# EAGLE board Qwiic_Iridium_9603N-Panel (EAGLE 9.5.2), part 1 of 3
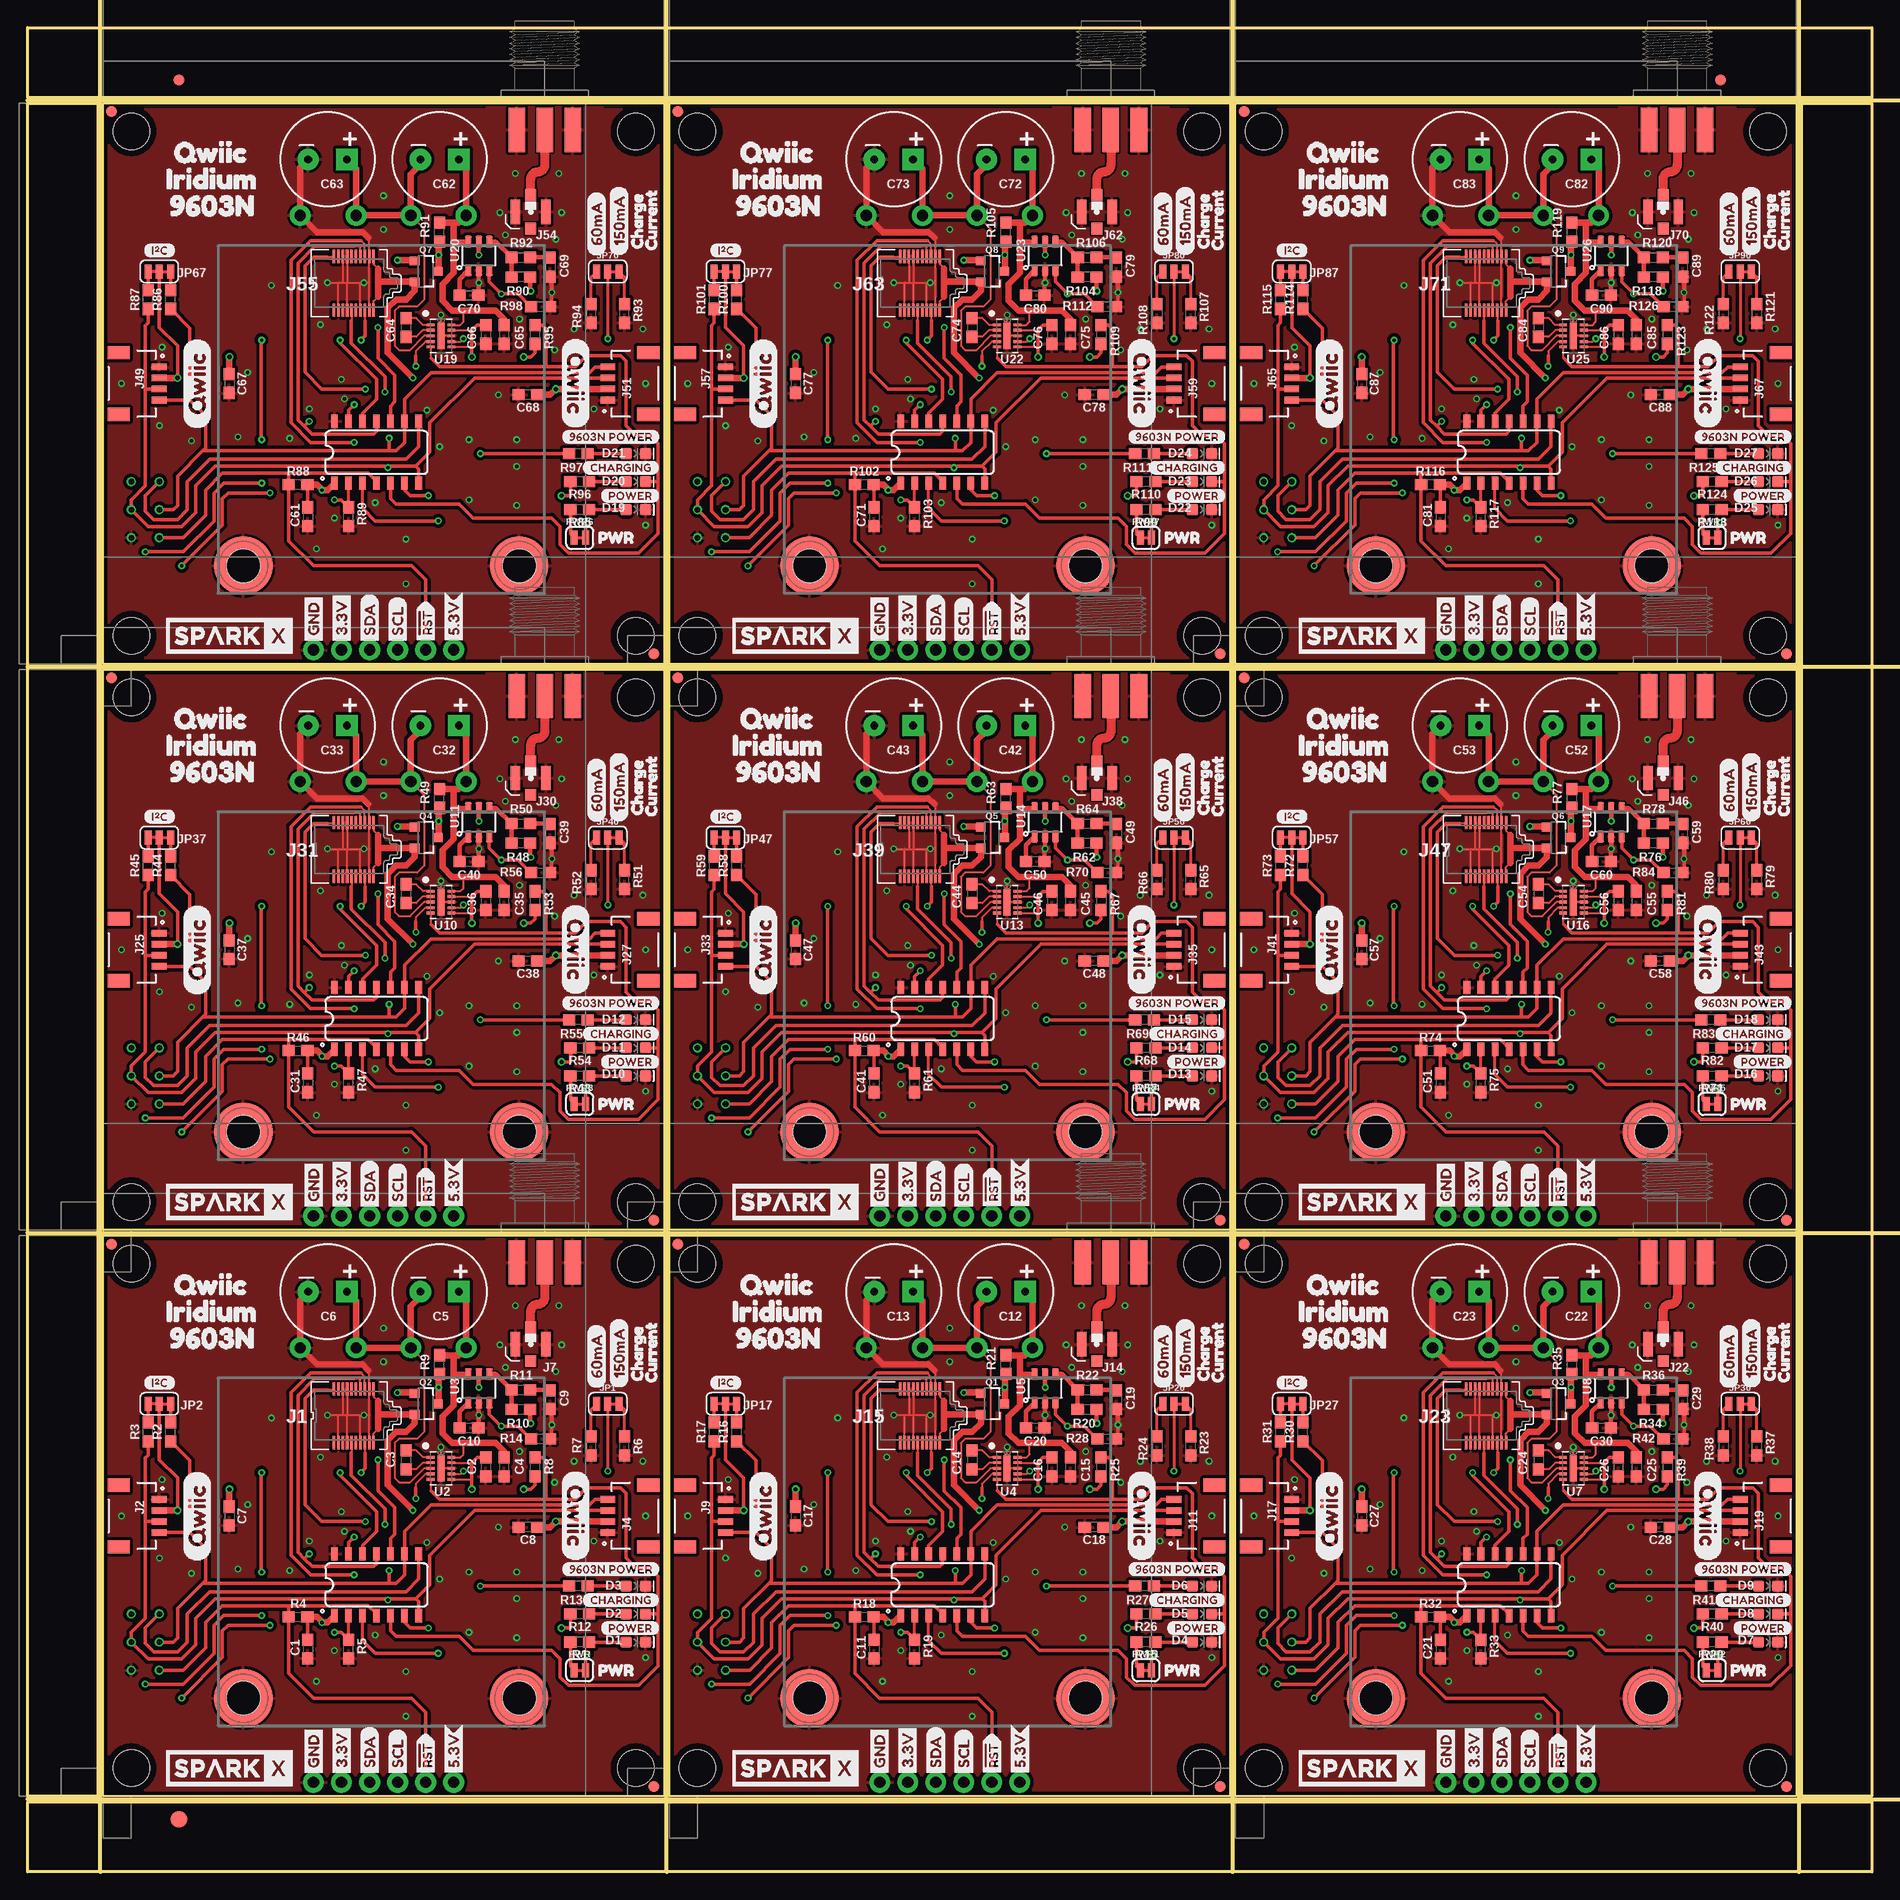
[diagram p0: board, top side]
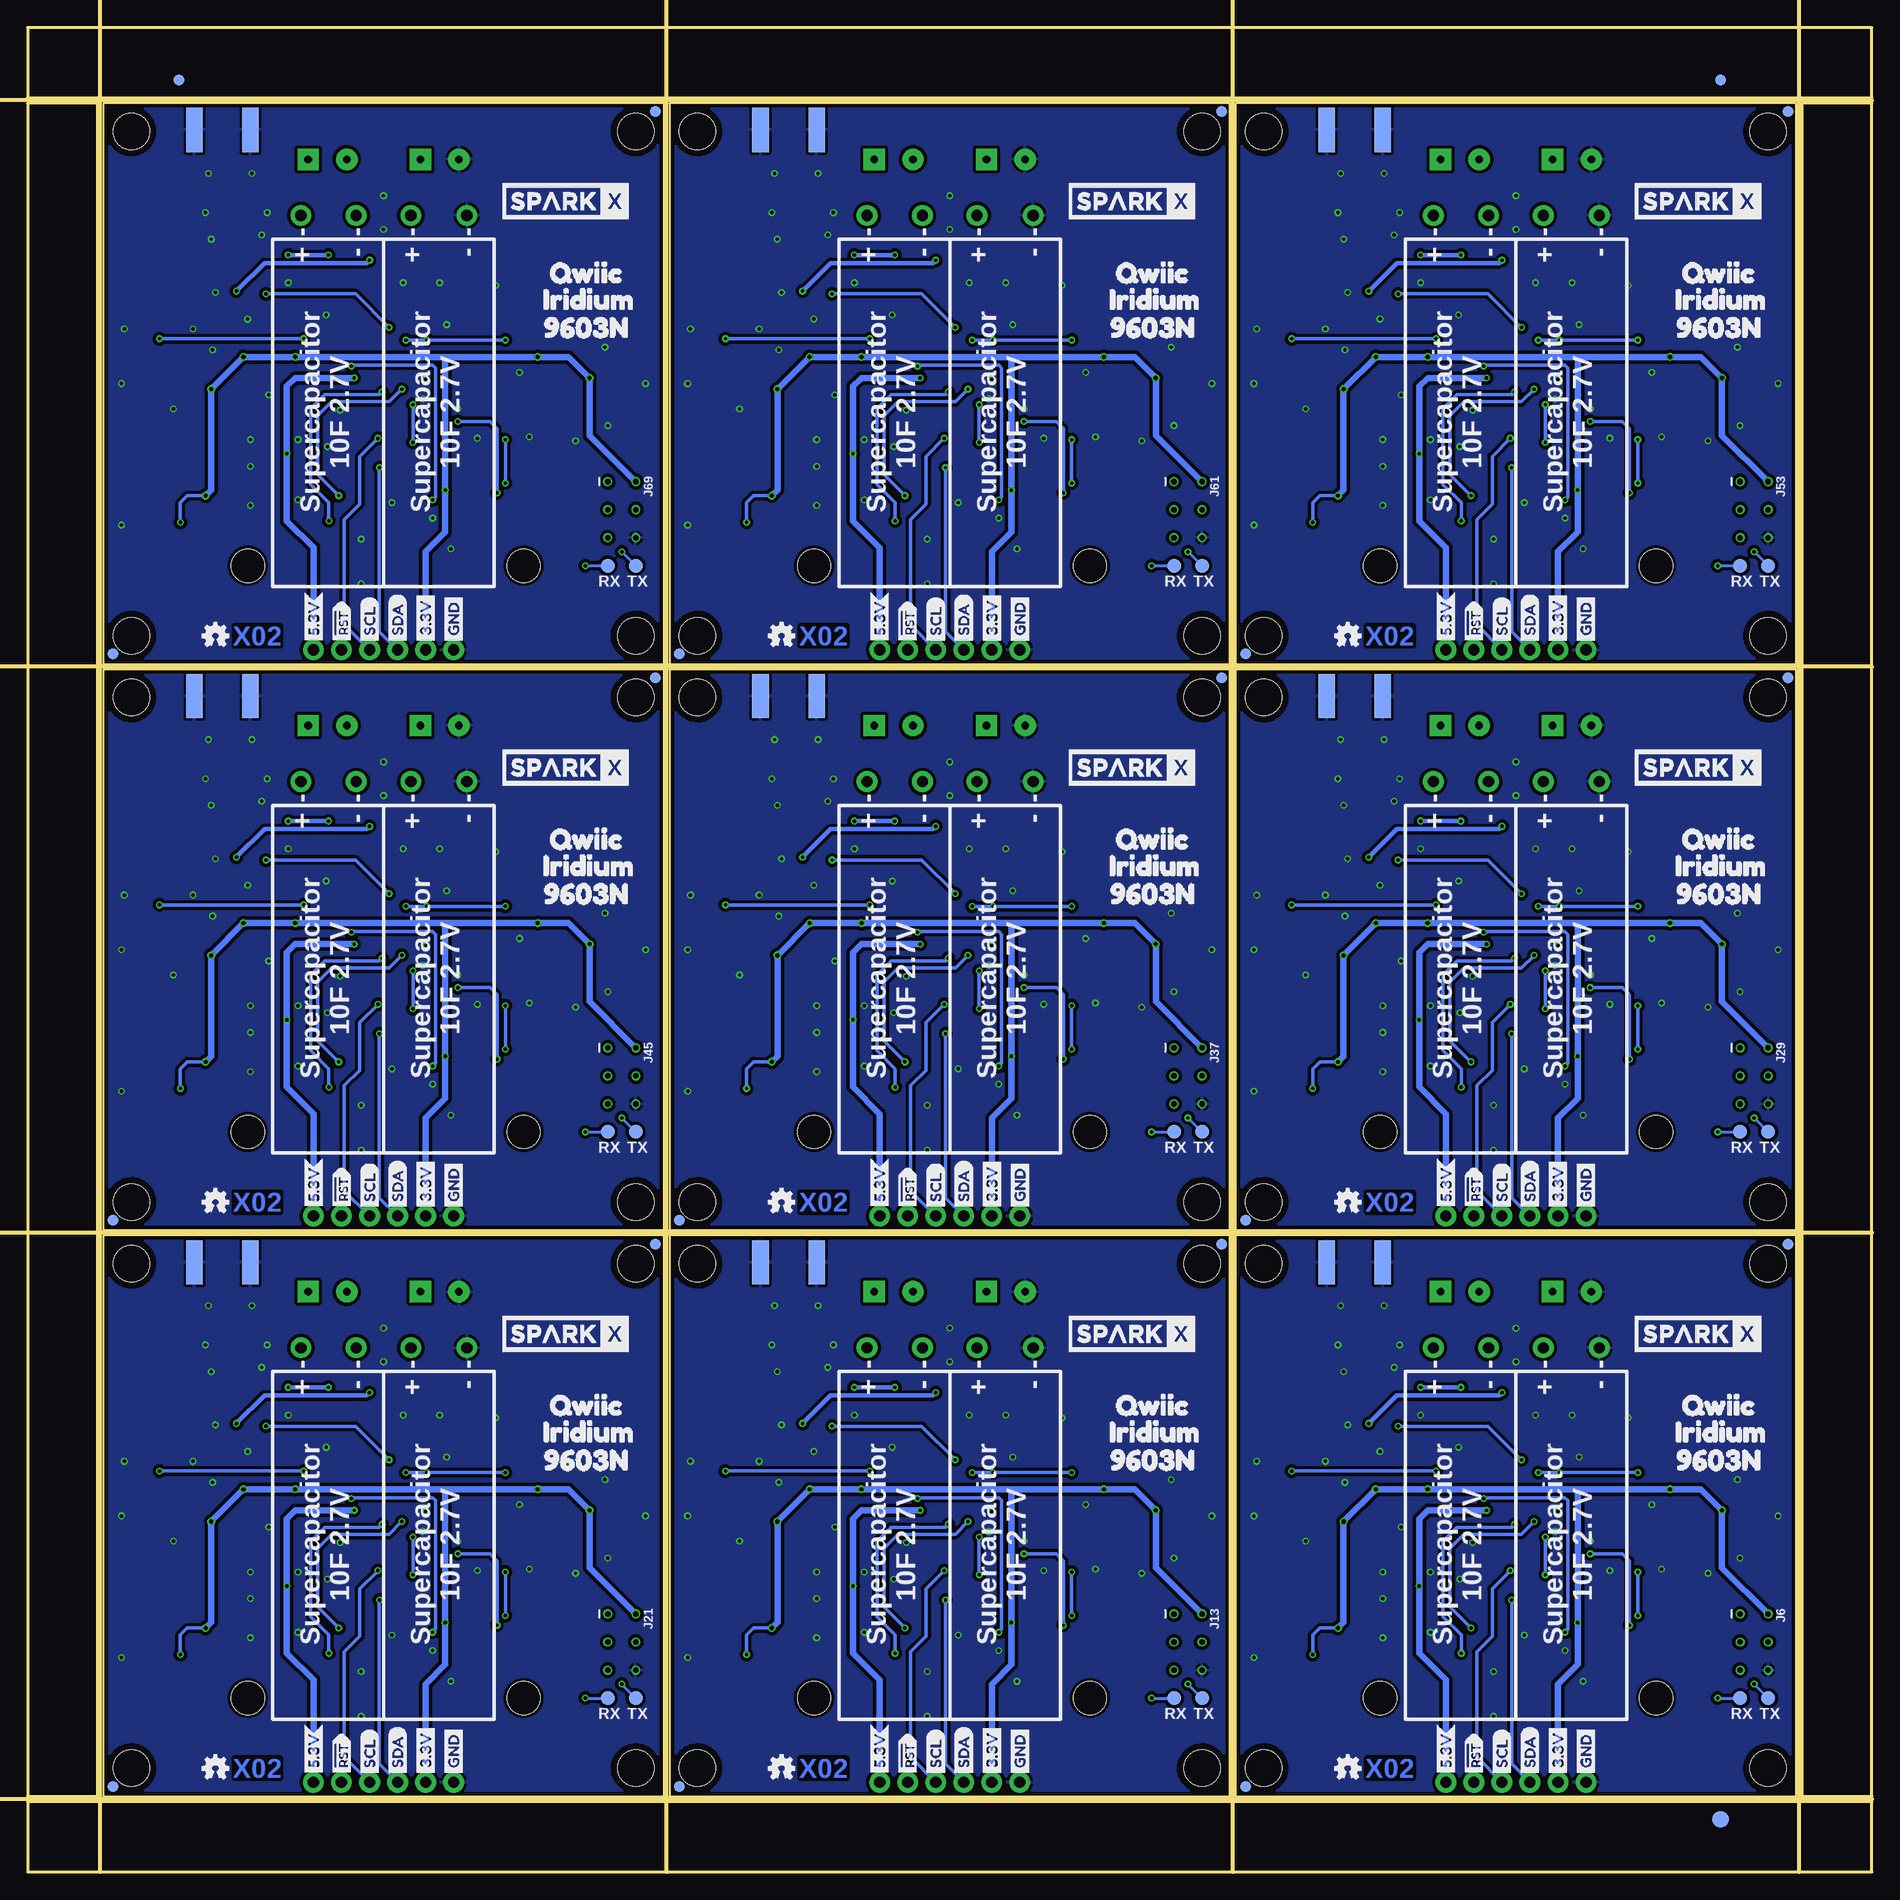
[diagram p1: board, bottom side, seen from below]

Size 167.13 x 167.13 mm. Coordinates in mm from the lower left corner, seen from the top.
Outline: 6.86,6.86 6.86,57.66 57.66,57.66 57.66,6.86 6.86,6.86
Outline: 58.17,6.86 58.17,57.66 108.97,57.66 108.97,6.86 58.17,6.86
Outline: 109.47,6.86 109.47,57.66 160.27,57.66 160.27,6.86 109.47,6.86
Outline: 6.86,58.17 6.86,108.97 57.66,108.97 57.66,58.17 6.86,58.17
Outline: 58.17,58.17 58.17,108.97 108.97,108.97 108.97,58.17 58.17,58.17
Outline: 109.47,58.17 109.47,108.97 160.27,108.97 160.27,58.17 109.47,58.17
Outline: 6.86,109.47 6.86,160.27 57.66,160.27 57.66,109.47 6.86,109.47
Outline: 58.17,109.47 58.17,160.27 108.97,160.27 108.97,109.47 58.17,109.47
Outline: 109.47,109.47 109.47,160.27 160.27,160.27 160.27,109.47 109.47,109.47
Outline: 0,6.35 167.13,6.35 167.13,0 0,0 0,6.35
Outline: 160.78,160.27 167.13,160.27 167.13,6.86 160.78,6.86 160.78,160.27
Outline: 0,167.13 167.13,167.13 167.13,160.78 0,160.78 0,167.13
Outline: 0,160.27 6.35,160.27 6.35,6.86 0,6.86 0,160.27
Copper layers (1*16): Top 0.035mm / dielectric 1.5mm / Bottom 0.035mm
Design rules "SparkFun-2-layer-PCBWay-LIMIT": minimum track width 6mil, minimum drill 0.3mm, track to track 6mil, track to pad 6mil, pad to pad 6mil, via to via 6mil, smd to smd 6mil, copper to edge 6mil, drill to drill 6mil, minimum pad ring 6mil, minimum via ring 6mil, stop-mask expansion 4mil, vias tented up to drill 25mil, thermal gap 10mil
Net classes: 1 3.3V: width 0.305 mm
Milling: 8 lines

## Footprints (pad centres in the part's own frame; a part is rotated, then mirrored left to right if it is on the bottom)
0603 = smd 1.1 x 1: 1 -0.85,0; 2 0.85,0
CPOL-RADIAL-1F-2.7V = drill 0.7 pad 1.93 square: + 1.75,0 | drill 0.7 pad 1.93: - -1.75,0
LED-0603 = smd 1 x 1: A -0.877,0; C 0.877,0
SMA-EDGE = smd 1.5 x 4: GND@0 -2.54,0; GND@1 2.54,0; SIG 0,0 | smd 1.5 x 4 bottom: GND@2 -2.54,0; GND@3 2.54,0
FIDUCIAL-1X2 = smd 1 x 1: 1 0,0
FIDUCIAL-1.5X3 = smd 1.5 x 1.5: 1 0,0
IRIDIUM_9603N = smd 0.23 x 1.2: 1 11.8,28.035; 2 11.8,23.165; 3 11.4,28.035; 4 11.4,23.165; 5 11,28.035; 6 11,23.165; 7 10.6,28.035; 8 10.6,23.165; 9 10.2,28.035; 10 10.2,23.165; 11 9.8,28.035; 12 9.8,23.165; 13 9.4,28.035; 14 9.4,23.165; 15 9,28.035; 16 9,23.165; 17 8.6,28.035; 18 8.6,23.165; 19 8.2,28.035; 20 8.2,23.165 | smd 5.3 x 5.3: HOLE1 0,0; HOLE2 25,0 | hole 3: 0,0; 25,0
JST04_1MM_RA = smd 0.6 x 1.35: 1 -1.5,0; 2 -0.5,0; 3 0.5,0; 4 1.5,0 | smd 1.2 x 2: NC1 2.8,-3.675; NC2 -2.8,-3.675
1X04_NO_SILK = drill 1.016 pad 1.88: 1 0,0; 2 2.54,0; 3 5.08,0; 4 7.62,0
1X01_NO_SILK = drill 1.016 pad 1.88: 1 0,0
2X3_TEST_POINTS = drill 0.508: 1 -2.54,-1.27; 2 -2.54,1.27; 3 0,-1.27; 4 0,1.27; 5 2.54,-1.27; 6 2.54,1.27
U.FL = smd 2.2 x 0.85: 1 0,1.375; 2 0,-1.375 | smd 1.05 x 1: FEED 1.525,0; NC -1.525,0
SMT-JUMPER_3_1-NC_TRACE_SILK = smd 0.635 x 1.27: 1 -1.016,0; 2 0,0; 3 1.016,0
SMT-JUMPER_3_2-NC_TRACE_SILK = smd 0.635 x 1.27: 1 -1.016,0; 2 0,0; 3 1.016,0
STAND-OFF = hole 3.302: 0,0
SMT-JUMPER_2_NC_TRACE_SILK = smd 0.635 x 1.27: 1 -0.508,0; 2 0.508,0
SOT23-3 = smd 0.8 x 0.9: 1 -0.95,-1; 2 0.95,-1; 3 0,1.1
PAD.03X.05 = smd 1.27 x 1.27: P$1 0,0
ATTINY841 = smd 0.6 x 1.2: 1 -3.175,-2.8; 2 -1.905,-2.8; 3 -0.635,-2.8; 4 0.635,-2.8; 5 1.905,-2.8; 6 3.175,-2.8; 7 4.445,-2.8; 8 4.445,2.8; 9 3.175,2.8; 10 1.905,2.8; 11 0.635,2.8; 12 -0.635,2.8; 13 -1.905,2.8; 14 -3.175,2.8
DFN300X200-10L = smd 0.711 x 0.254: 1 -0.94,0.991; 2 -0.94,0.508; 3 -0.94,0; 4 -0.94,-0.508; 5 -0.94,-0.991; 6 0.94,-0.991; 7 0.94,-0.508; 8 0.94,0; 9 0.94,0.508; 10 0.94,0.991 | smd 0.635 x 2.388: 11 0,0
TSOT6 = smd 0.6 x 1.05: 1 -0.95,-1.3; 2 0,-1.3; 3 0.95,-1.3; 4 0.95,1.3; 5 0,1.3; 6 -0.95,1.3

## Placement (x,y rotation side)
C1  0.1uF  [0603]  25.4,20.19 270 top
C2  2.2uF  [0603]  41.53,36.7 270 top
C3  1.0uF  [0603]  34.29,37.34 270 top
C4  0.22uF  [0603]  43.18,36.7 270 top
C5  1F 2.7V  [CPOL-RADIAL-1F-2.7V]  37.34,52.58 0 top
C6  1F 2.7V  [CPOL-RADIAL-1F-2.7V]  27.18,52.58 0 top
C7  10uF  [0603]  18.29,32.26 270 top
C8  1.0uF  [0603]  45.34,31.24 180 top
C9  10nF  [0603]  47.37,42.8 270 top
C10  1.0uF  [0603]  40,40.26 0 top
C11  0.1uF  [0603]  76.71,20.19 270 top
C12  1F 2.7V  [CPOL-RADIAL-1F-2.7V]  88.65,52.58 0 top
C13  1F 2.7V  [CPOL-RADIAL-1F-2.7V]  78.49,52.58 0 top
C14  1.0uF  [0603]  85.6,37.34 270 top
C15  0.22uF  [0603]  94.49,36.7 270 top
C16  2.2uF  [0603]  92.84,36.7 270 top
C17  10uF  [0603]  69.6,32.26 270 top
C18  1.0uF  [0603]  96.65,31.24 180 top
C19  10nF  [0603]  98.68,42.8 270 top
C20  1.0uF  [0603]  91.31,40.26 0 top
C21  0.1uF  [0603]  128.02,20.19 270 top
C22  1F 2.7V  [CPOL-RADIAL-1F-2.7V]  139.95,52.58 0 top
C23  1F 2.7V  [CPOL-RADIAL-1F-2.7V]  129.79,52.58 0 top
C24  1.0uF  [0603]  136.91,37.34 270 top
C25  0.22uF  [0603]  145.8,36.7 270 top
C26  2.2uF  [0603]  144.15,36.7 270 top
C27  10uF  [0603]  120.9,32.26 270 top
C28  1.0uF  [0603]  147.96,31.24 180 top
C29  10nF  [0603]  149.99,42.8 270 top
C30  1.0uF  [0603]  142.62,40.26 0 top
C31  0.1uF  [0603]  25.4,71.5 270 top
C32  1F 2.7V  [CPOL-RADIAL-1F-2.7V]  37.34,103.89 0 top
C33  1F 2.7V  [CPOL-RADIAL-1F-2.7V]  27.18,103.89 0 top
C34  1.0uF  [0603]  34.29,88.65 270 top
C35  0.22uF  [0603]  43.18,88.01 270 top
C36  2.2uF  [0603]  41.53,88.01 270 top
C37  10uF  [0603]  18.29,83.57 270 top
C38  1.0uF  [0603]  45.34,82.55 180 top
C39  10nF  [0603]  47.37,94.11 270 top
C40  1.0uF  [0603]  40,91.57 0 top
C41  0.1uF  [0603]  76.71,71.5 270 top
C42  1F 2.7V  [CPOL-RADIAL-1F-2.7V]  88.65,103.89 0 top
C43  1F 2.7V  [CPOL-RADIAL-1F-2.7V]  78.49,103.89 0 top
C44  1.0uF  [0603]  85.6,88.65 270 top
C45  0.22uF  [0603]  94.49,88.01 270 top
C46  2.2uF  [0603]  92.84,88.01 270 top
C47  10uF  [0603]  69.6,83.57 270 top
C48  1.0uF  [0603]  96.65,82.55 180 top
C49  10nF  [0603]  98.68,94.11 270 top
C50  1.0uF  [0603]  91.31,91.57 0 top
C51  0.1uF  [0603]  128.02,71.5 270 top
C52  1F 2.7V  [CPOL-RADIAL-1F-2.7V]  139.95,103.89 0 top
C53  1F 2.7V  [CPOL-RADIAL-1F-2.7V]  129.79,103.89 0 top
C54  1.0uF  [0603]  136.91,88.65 270 top
C55  0.22uF  [0603]  145.8,88.01 270 top
C56  2.2uF  [0603]  144.15,88.01 270 top
C57  10uF  [0603]  120.9,83.57 270 top
C58  1.0uF  [0603]  147.96,82.55 180 top
C59  10nF  [0603]  149.99,94.11 270 top
C60  1.0uF  [0603]  142.62,91.57 0 top
C61  0.1uF  [0603]  25.4,122.81 270 top
C62  1F 2.7V  [CPOL-RADIAL-1F-2.7V]  37.34,155.19 0 top
C63  1F 2.7V  [CPOL-RADIAL-1F-2.7V]  27.18,155.19 0 top
C64  1.0uF  [0603]  34.29,139.95 270 top
C65  0.22uF  [0603]  43.18,139.32 270 top
C66  2.2uF  [0603]  41.53,139.32 270 top
C67  10uF  [0603]  18.29,134.87 270 top
C68  1.0uF  [0603]  45.34,133.86 180 top
C69  10nF  [0603]  47.37,145.41 270 top
C70  1.0uF  [0603]  40,142.88 0 top
C71  0.1uF  [0603]  76.71,122.81 270 top
C72  1F 2.7V  [CPOL-RADIAL-1F-2.7V]  88.65,155.19 0 top
C73  1F 2.7V  [CPOL-RADIAL-1F-2.7V]  78.49,155.19 0 top
C74  1.0uF  [0603]  85.6,139.95 270 top
C75  0.22uF  [0603]  94.49,139.32 270 top
C76  2.2uF  [0603]  92.84,139.32 270 top
C77  10uF  [0603]  69.6,134.87 270 top
C78  1.0uF  [0603]  96.65,133.86 180 top
C79  10nF  [0603]  98.68,145.41 270 top
C80  1.0uF  [0603]  91.31,142.88 0 top
C81  0.1uF  [0603]  128.02,122.81 270 top
C82  1F 2.7V  [CPOL-RADIAL-1F-2.7V]  139.95,155.19 0 top
C83  1F 2.7V  [CPOL-RADIAL-1F-2.7V]  129.79,155.19 0 top
C84  1.0uF  [0603]  136.91,139.95 270 top
C85  0.22uF  [0603]  145.8,139.32 270 top
C86  2.2uF  [0603]  144.15,139.32 270 top
C87  10uF  [0603]  120.9,134.87 270 top
C88  1.0uF  [0603]  147.96,133.86 180 top
C89  10nF  [0603]  149.99,145.41 270 top
C90  1.0uF  [0603]  142.62,142.88 0 top
D1  RED  [LED-0603]  55.12,20.83 0 top
D2  Yellow  [LED-0603]  55.12,23.37 0 top
D3  GREEN  [LED-0603]  55.12,25.91 0 top
D4  RED  [LED-0603]  106.43,20.83 0 top
D5  Yellow  [LED-0603]  106.43,23.37 0 top
D6  GREEN  [LED-0603]  106.43,25.91 0 top
D7  RED  [LED-0603]  157.73,20.83 0 top
D8  Yellow  [LED-0603]  157.73,23.37 0 top
D9  GREEN  [LED-0603]  157.73,25.91 0 top
D10  RED  [LED-0603]  55.12,72.14 0 top
D11  Yellow  [LED-0603]  55.12,74.68 0 top
D12  GREEN  [LED-0603]  55.12,77.22 0 top
D13  RED  [LED-0603]  106.43,72.14 0 top
D14  Yellow  [LED-0603]  106.43,74.68 0 top
D15  GREEN  [LED-0603]  106.43,77.22 0 top
D16  RED  [LED-0603]  157.73,72.14 0 top
D17  Yellow  [LED-0603]  157.73,74.68 0 top
D18  GREEN  [LED-0603]  157.73,77.22 0 top
D19  RED  [LED-0603]  55.12,123.44 0 top
D20  Yellow  [LED-0603]  55.12,125.98 0 top
D21  GREEN  [LED-0603]  55.12,128.52 0 top
D22  RED  [LED-0603]  106.43,123.44 0 top
D23  Yellow  [LED-0603]  106.43,125.98 0 top
D24  GREEN  [LED-0603]  106.43,128.52 0 top
D25  RED  [LED-0603]  157.73,123.44 0 top
D26  Yellow  [LED-0603]  157.73,125.98 0 top
D27  GREEN  [LED-0603]  157.73,128.52 0 top
E1  ANTENNA-GROUNDEDEDGE_SMA  [SMA-EDGE]  46.86,55.24 0 top
E2  ANTENNA-GROUNDEDEDGE_SMA  [SMA-EDGE]  98.17,55.24 0 top
E3  ANTENNA-GROUNDEDEDGE_SMA  [SMA-EDGE]  149.48,55.24 0 top
E4  ANTENNA-GROUNDEDEDGE_SMA  [SMA-EDGE]  46.86,106.55 0 top
E5  ANTENNA-GROUNDEDEDGE_SMA  [SMA-EDGE]  98.17,106.55 0 top
E6  ANTENNA-GROUNDEDEDGE_SMA  [SMA-EDGE]  149.48,106.55 0 top
E7  ANTENNA-GROUNDEDEDGE_SMA  [SMA-EDGE]  46.86,157.86 0 top
E8  ANTENNA-GROUNDEDEDGE_SMA  [SMA-EDGE]  98.17,157.86 0 top
E9  ANTENNA-GROUNDEDEDGE_SMA  [SMA-EDGE]  149.48,157.86 0 top
E$1  [FIDUCIAL-1X2]  13.72,162.37 0 top
E$2  [FIDUCIAL-1X2]  13.72,162.37 0 bottom
E$3  [FIDUCIAL-1X2]  153.42,162.37 0 top
E$4  [FIDUCIAL-1X2]  153.42,162.37 0 bottom
E$5  [FIDUCIAL-1.5X3]  13.72,4.76 0 top
E$6  [FIDUCIAL-1.5X3]  13.72,4.76 0 bottom
J1  IRIDIUM_9603N  [IRIDIUM_9603N]  19.56,15.75 0 top
J2  [JST04_1MM_RA]  11.94,32.26 270 top
J3  PTH  [1X04_NO_SILK]  25.91,8.13 0 top
J4  [JST04_1MM_RA]  52.58,32.26 90 top
J5  [1X01_NO_SILK]  36.07,8.13 0 top
J6  ISP  [2X3_TEST_POINTS]  10.67,20.83 270 bottom
J7  U.FL  [U.FL]  45.59,47.82 90 top
J8  [1X01_NO_SILK]  38.61,8.13 0 top
J9  [JST04_1MM_RA]  63.25,32.26 270 top
J10  PTH  [1X04_NO_SILK]  77.22,8.13 0 top
J11  [JST04_1MM_RA]  103.89,32.26 90 top
J12  [1X01_NO_SILK]  87.38,8.13 0 top
J13  ISP  [2X3_TEST_POINTS]  61.98,20.83 270 bottom
J14  U.FL  [U.FL]  96.9,47.82 90 top
J15  IRIDIUM_9603N  [IRIDIUM_9603N]  70.87,15.75 0 top
J16  [1X01_NO_SILK]  89.92,8.13 0 top
J17  [JST04_1MM_RA]  114.55,32.26 270 top
J18  PTH  [1X04_NO_SILK]  128.52,8.13 0 top
J19  [JST04_1MM_RA]  155.19,32.26 90 top
J20  [1X01_NO_SILK]  138.68,8.13 0 top
J21  ISP  [2X3_TEST_POINTS]  113.28,20.83 270 bottom
J22  U.FL  [U.FL]  148.21,47.82 90 top
J23  IRIDIUM_9603N  [IRIDIUM_9603N]  122.17,15.75 0 top
J24  [1X01_NO_SILK]  141.22,8.13 0 top
J25  [JST04_1MM_RA]  11.94,83.57 270 top
J26  PTH  [1X04_NO_SILK]  25.91,59.44 0 top
J27  [JST04_1MM_RA]  52.58,83.57 90 top
J28  [1X01_NO_SILK]  36.07,59.44 0 top
J29  ISP  [2X3_TEST_POINTS]  10.67,72.14 270 bottom
J30  U.FL  [U.FL]  45.59,99.13 90 top
J31  IRIDIUM_9603N  [IRIDIUM_9603N]  19.56,67.06 0 top
J32  [1X01_NO_SILK]  38.61,59.44 0 top
J33  [JST04_1MM_RA]  63.25,83.57 270 top
J34  PTH  [1X04_NO_SILK]  77.22,59.44 0 top
J35  [JST04_1MM_RA]  103.89,83.57 90 top
J36  [1X01_NO_SILK]  87.38,59.44 0 top
J37  ISP  [2X3_TEST_POINTS]  61.98,72.14 270 bottom
J38  U.FL  [U.FL]  96.9,99.13 90 top
J39  IRIDIUM_9603N  [IRIDIUM_9603N]  70.87,67.06 0 top
J40  [1X01_NO_SILK]  89.92,59.44 0 top
J41  [JST04_1MM_RA]  114.55,83.57 270 top
J42  PTH  [1X04_NO_SILK]  128.52,59.44 0 top
J43  [JST04_1MM_RA]  155.19,83.57 90 top
J44  [1X01_NO_SILK]  138.68,59.44 0 top
J45  ISP  [2X3_TEST_POINTS]  113.28,72.14 270 bottom
J46  U.FL  [U.FL]  148.21,99.13 90 top
J47  IRIDIUM_9603N  [IRIDIUM_9603N]  122.17,67.06 0 top
J48  [1X01_NO_SILK]  141.22,59.44 0 top
J49  [JST04_1MM_RA]  11.94,134.87 270 top
J50  PTH  [1X04_NO_SILK]  25.91,110.74 0 top
J51  [JST04_1MM_RA]  52.58,134.87 90 top
J52  [1X01_NO_SILK]  36.07,110.74 0 top
J53  ISP  [2X3_TEST_POINTS]  10.67,123.44 270 bottom
J54  U.FL  [U.FL]  45.59,150.43 90 top
J55  IRIDIUM_9603N  [IRIDIUM_9603N]  19.56,118.36 0 top
J56  [1X01_NO_SILK]  38.61,110.74 0 top
J57  [JST04_1MM_RA]  63.25,134.87 270 top
J58  PTH  [1X04_NO_SILK]  77.22,110.74 0 top
J59  [JST04_1MM_RA]  103.89,134.87 90 top
J60  [1X01_NO_SILK]  87.38,110.74 0 top
J61  ISP  [2X3_TEST_POINTS]  61.98,123.44 270 bottom
J62  U.FL  [U.FL]  96.9,150.43 90 top
J63  IRIDIUM_9603N  [IRIDIUM_9603N]  70.87,118.36 0 top
J64  [1X01_NO_SILK]  89.92,110.74 0 top
J65  [JST04_1MM_RA]  114.55,134.87 270 top
J66  PTH  [1X04_NO_SILK]  128.52,110.74 0 top
J67  [JST04_1MM_RA]  155.19,134.87 90 top
J68  [1X01_NO_SILK]  138.68,110.74 0 top
J69  ISP  [2X3_TEST_POINTS]  113.28,123.44 270 bottom
J70  U.FL  [U.FL]  148.21,150.43 90 top
J71  IRIDIUM_9603N  [IRIDIUM_9603N]  122.17,118.36 0 top
J72  [1X01_NO_SILK]  141.22,110.74 0 top
JP1  JUMPER-SMT_3_1-NC_TRACE_SILK  [SMT-JUMPER_3_1-NC_TRACE_SILK]  52.58,42.42 0 top
JP2  JUMPER-SMT_3_2-NC_TRACE_SILK  [SMT-JUMPER_3_2-NC_TRACE_SILK]  11.94,42.42 180 top
JP3  STAND-OFF  [STAND-OFF]  9.4,55.12 0 top
JP4  STAND-OFF  [STAND-OFF]  55.12,55.12 0 top
JP5  FIDUCIAL1X2  [FIDUCIAL-1X2]  56.77,7.75 0 bottom
JP6  FIDUCIAL1X2  [FIDUCIAL-1X2]  7.62,56.9 0 top
JP7  FIDUCIAL1X2  [FIDUCIAL-1X2]  7.62,56.9 0 bottom
JP8  FIDUCIAL1X2  [FIDUCIAL-1X2]  56.77,7.75 0 top
JP9  STAND-OFF  [STAND-OFF]  55.12,9.4 0 top
JP10  STAND-OFF  [STAND-OFF]  9.4,9.4 0 top
JP11  STAND-OFF  [STAND-OFF]  60.71,55.12 0 top
JP12  STAND-OFF  [STAND-OFF]  106.43,55.12 0 top
JP13  FIDUCIAL1X2  [FIDUCIAL-1X2]  108.08,7.75 0 top
JP14  FIDUCIAL1X2  [FIDUCIAL-1X2]  58.93,56.9 0 top
JP15  FIDUCIAL1X2  [FIDUCIAL-1X2]  58.93,56.9 0 bottom
JP16  FIDUCIAL1X2  [FIDUCIAL-1X2]  108.08,7.75 0 bottom
JP17  JUMPER-SMT_3_2-NC_TRACE_SILK  [SMT-JUMPER_3_2-NC_TRACE_SILK]  63.25,42.42 180 top
JP18  STAND-OFF  [STAND-OFF]  60.71,9.4 0 top
JP19  STAND-OFF  [STAND-OFF]  106.43,9.4 0 top
JP20  JUMPER-SMT_3_1-NC_TRACE_SILK  [SMT-JUMPER_3_1-NC_TRACE_SILK]  103.89,42.42 0 top
JP21  STAND-OFF  [STAND-OFF]  112.01,55.12 0 top
JP22  STAND-OFF  [STAND-OFF]  157.73,55.12 0 top
JP23  FIDUCIAL1X2  [FIDUCIAL-1X2]  159.38,7.75 0 top
JP24  FIDUCIAL1X2  [FIDUCIAL-1X2]  110.24,56.9 0 top
JP25  FIDUCIAL1X2  [FIDUCIAL-1X2]  110.24,56.9 0 bottom
JP26  FIDUCIAL1X2  [FIDUCIAL-1X2]  159.38,7.75 0 bottom
JP27  JUMPER-SMT_3_2-NC_TRACE_SILK  [SMT-JUMPER_3_2-NC_TRACE_SILK]  114.55,42.42 180 top
JP28  STAND-OFF  [STAND-OFF]  112.01,9.4 0 top
JP29  STAND-OFF  [STAND-OFF]  157.73,9.4 0 top
JP30  JUMPER-SMT_3_1-NC_TRACE_SILK  [SMT-JUMPER_3_1-NC_TRACE_SILK]  155.19,42.42 0 top
JP31  STAND-OFF  [STAND-OFF]  9.4,106.43 0 top
JP32  STAND-OFF  [STAND-OFF]  55.12,106.43 0 top
JP33  FIDUCIAL1X2  [FIDUCIAL-1X2]  56.77,59.05 0 top
JP34  FIDUCIAL1X2  [FIDUCIAL-1X2]  7.62,108.2 0 top
JP35  FIDUCIAL1X2  [FIDUCIAL-1X2]  7.62,108.2 0 bottom
JP36  FIDUCIAL1X2  [FIDUCIAL-1X2]  56.77,59.05 0 bottom
JP37  JUMPER-SMT_3_2-NC_TRACE_SILK  [SMT-JUMPER_3_2-NC_TRACE_SILK]  11.94,93.73 180 top
JP38  STAND-OFF  [STAND-OFF]  9.4,60.71 0 top
JP39  STAND-OFF  [STAND-OFF]  55.12,60.71 0 top
JP40  JUMPER-SMT_3_1-NC_TRACE_SILK  [SMT-JUMPER_3_1-NC_TRACE_SILK]  52.58,93.73 0 top
JP41  STAND-OFF  [STAND-OFF]  60.71,106.43 0 top
JP42  STAND-OFF  [STAND-OFF]  106.43,106.43 0 top
JP43  FIDUCIAL1X2  [FIDUCIAL-1X2]  108.08,59.05 0 top
JP44  FIDUCIAL1X2  [FIDUCIAL-1X2]  58.93,108.2 0 top
JP45  FIDUCIAL1X2  [FIDUCIAL-1X2]  58.93,108.2 0 bottom
JP46  FIDUCIAL1X2  [FIDUCIAL-1X2]  108.08,59.05 0 bottom
JP47  JUMPER-SMT_3_2-NC_TRACE_SILK  [SMT-JUMPER_3_2-NC_TRACE_SILK]  63.25,93.73 180 top
JP48  STAND-OFF  [STAND-OFF]  60.71,60.71 0 top
JP49  STAND-OFF  [STAND-OFF]  106.43,60.71 0 top
JP50  JUMPER-SMT_3_1-NC_TRACE_SILK  [SMT-JUMPER_3_1-NC_TRACE_SILK]  103.89,93.73 0 top
JP51  STAND-OFF  [STAND-OFF]  112.01,106.43 0 top
JP52  STAND-OFF  [STAND-OFF]  157.73,106.43 0 top
JP53  FIDUCIAL1X2  [FIDUCIAL-1X2]  159.38,59.05 0 top
JP54  FIDUCIAL1X2  [FIDUCIAL-1X2]  110.24,108.2 0 top
JP55  FIDUCIAL1X2  [FIDUCIAL-1X2]  110.24,108.2 0 bottom
JP56  FIDUCIAL1X2  [FIDUCIAL-1X2]  159.38,59.05 0 bottom
JP57  JUMPER-SMT_3_2-NC_TRACE_SILK  [SMT-JUMPER_3_2-NC_TRACE_SILK]  114.55,93.73 180 top
JP58  STAND-OFF  [STAND-OFF]  112.01,60.71 0 top
JP59  STAND-OFF  [STAND-OFF]  157.73,60.71 0 top
JP60  JUMPER-SMT_3_1-NC_TRACE_SILK  [SMT-JUMPER_3_1-NC_TRACE_SILK]  155.19,93.73 0 top
JP61  STAND-OFF  [STAND-OFF]  9.4,157.73 0 top
JP62  STAND-OFF  [STAND-OFF]  55.12,157.73 0 top
JP63  FIDUCIAL1X2  [FIDUCIAL-1X2]  56.77,110.36 0 top
JP64  FIDUCIAL1X2  [FIDUCIAL-1X2]  7.62,159.51 0 top
JP65  FIDUCIAL1X2  [FIDUCIAL-1X2]  7.62,159.51 0 bottom
JP66  FIDUCIAL1X2  [FIDUCIAL-1X2]  56.77,110.36 0 bottom
JP67  JUMPER-SMT_3_2-NC_TRACE_SILK  [SMT-JUMPER_3_2-NC_TRACE_SILK]  11.94,145.03 180 top
JP68  STAND-OFF  [STAND-OFF]  9.4,112.01 0 top
JP69  STAND-OFF  [STAND-OFF]  55.12,112.01 0 top
JP70  JUMPER-SMT_3_1-NC_TRACE_SILK  [SMT-JUMPER_3_1-NC_TRACE_SILK]  52.58,145.03 0 top
JP71  STAND-OFF  [STAND-OFF]  60.71,157.73 0 top
JP72  STAND-OFF  [STAND-OFF]  106.43,157.73 0 top
JP73  FIDUCIAL1X2  [FIDUCIAL-1X2]  108.08,110.36 0 top
JP74  FIDUCIAL1X2  [FIDUCIAL-1X2]  58.93,159.51 0 top
JP75  FIDUCIAL1X2  [FIDUCIAL-1X2]  58.93,159.51 0 bottom
JP76  FIDUCIAL1X2  [FIDUCIAL-1X2]  108.08,110.36 0 bottom
JP77  JUMPER-SMT_3_2-NC_TRACE_SILK  [SMT-JUMPER_3_2-NC_TRACE_SILK]  63.25,145.03 180 top
JP78  STAND-OFF  [STAND-OFF]  60.71,112.01 0 top
JP79  STAND-OFF  [STAND-OFF]  106.43,112.01 0 top
JP80  JUMPER-SMT_3_1-NC_TRACE_SILK  [SMT-JUMPER_3_1-NC_TRACE_SILK]  103.89,145.03 0 top
JP81  STAND-OFF  [STAND-OFF]  112.01,157.73 0 top
JP82  STAND-OFF  [STAND-OFF]  157.73,157.73 0 top
JP83  FIDUCIAL1X2  [FIDUCIAL-1X2]  159.38,110.36 0 top
JP84  FIDUCIAL1X2  [FIDUCIAL-1X2]  110.24,159.51 0 top
JP85  FIDUCIAL1X2  [FIDUCIAL-1X2]  110.24,159.51 0 bottom
JP86  FIDUCIAL1X2  [FIDUCIAL-1X2]  159.38,110.36 0 bottom
JP87  JUMPER-SMT_3_2-NC_TRACE_SILK  [SMT-JUMPER_3_2-NC_TRACE_SILK]  114.55,145.03 180 top
JP88  STAND-OFF  [STAND-OFF]  112.01,112.01 0 top
JP89  STAND-OFF  [STAND-OFF]  157.73,112.01 0 top
JP90  JUMPER-SMT_3_1-NC_TRACE_SILK  [SMT-JUMPER_3_1-NC_TRACE_SILK]  155.19,145.03 0 top
LOGO1  OSHW-LOGOMINI  [OSHW-LOGO-MINI]  47.5,9.4 0 bottom
LOGO2  OSHW-LOGOMINI  [OSHW-LOGO-MINI]  98.81,9.4 0 bottom
LOGO3  OSHW-LOGOMINI  [OSHW-LOGO-MINI]  150.11,9.4 0 bottom
LOGO4  OSHW-LOGOMINI  [OSHW-LOGO-MINI]  47.5,60.71 0 bottom
LOGO5  OSHW-LOGOMINI  [OSHW-LOGO-MINI]  98.81,60.71 0 bottom
LOGO6  OSHW-LOGOMINI  [OSHW-LOGO-MINI]  150.11,60.71 0 bottom
LOGO7  OSHW-LOGOMINI  [OSHW-LOGO-MINI]  47.5,112.01 0 bottom
LOGO8  OSHW-LOGOMINI  [OSHW-LOGO-MINI]  98.81,112.01 0 bottom
LOGO9  OSHW-LOGOMINI  [OSHW-LOGO-MINI]  150.11,112.01 0 bottom
PWR  JUMPER-SMT_2_NC_TRACE_SILK  [SMT-JUMPER_2_NC_TRACE_SILK]  50.04,18.29 0 top
PWR1  JUMPER-SMT_2_NC_TRACE_SILK  [SMT-JUMPER_2_NC_TRACE_SILK]  101.35,18.29 0 top
PWR2  JUMPER-SMT_2_NC_TRACE_SILK  [SMT-JUMPER_2_NC_TRACE_SILK]  152.65,18.29 0 top
PWR3  JUMPER-SMT_2_NC_TRACE_SILK  [SMT-JUMPER_2_NC_TRACE_SILK]  50.04,69.6 0 top
PWR4  JUMPER-SMT_2_NC_TRACE_SILK  [SMT-JUMPER_2_NC_TRACE_SILK]  101.35,69.6 0 top
PWR5  JUMPER-SMT_2_NC_TRACE_SILK  [SMT-JUMPER_2_NC_TRACE_SILK]  152.65,69.6 0 top
PWR6  JUMPER-SMT_2_NC_TRACE_SILK  [SMT-JUMPER_2_NC_TRACE_SILK]  50.04,120.9 0 top
PWR7  JUMPER-SMT_2_NC_TRACE_SILK  [SMT-JUMPER_2_NC_TRACE_SILK]  101.35,120.9 0 top
PWR8  JUMPER-SMT_2_NC_TRACE_SILK  [SMT-JUMPER_2_NC_TRACE_SILK]  152.65,120.9 0 top
Q1  5.8A/30V/35mΩ  [SOT23-3]  87.38,42.42 270 top
Q2  5.8A/30V/35mΩ  [SOT23-3]  36.07,42.42 270 top
Q3  5.8A/30V/35mΩ  [SOT23-3]  138.68,42.42 270 top
Q4  5.8A/30V/35mΩ  [SOT23-3]  36.07,93.73 270 top
Q5  5.8A/30V/35mΩ  [SOT23-3]  87.38,93.73 270 top
Q6  5.8A/30V/35mΩ  [SOT23-3]  138.68,93.73 270 top
Q7  5.8A/30V/35mΩ  [SOT23-3]  36.07,145.03 270 top
Q8  5.8A/30V/35mΩ  [SOT23-3]  87.38,145.03 270 top
Q9  5.8A/30V/35mΩ  [SOT23-3]  138.68,145.03 270 top
R1  1k  [0603]  50.04,20.83 180 top
R2  2.2k  [0603]  12.95,39.88 90 top
R3  2.2k  [0603]  10.92,39.88 90 top
R4  4.7k  [0603]  24.51,23.11 0 top
R5  10k  [0603]  29.08,20.19 90 top
R6  12k  [0603]  54.1,38.61 90 top
R7  30.1k  [0603]  51.05,38.61 270 top
R8  100k  [0603]  45.97,36.7 270 top
R9  0.012 Ohm  [0603]  37.34,45.97 90 top
R10  100  [0603]  44.7,41.91 180 top
R11  100  [0603]  44.7,43.69 0 top
R12  1k  [0603]  50.04,23.37 180 top
R13  2.2k  [0603]  49.91,25.91 180 top
R14  10k  [0603]  46.48,39.24 0 top
R15  1k  [0603]  101.35,20.83 180 top
R16  2.2k  [0603]  64.26,39.88 90 top
R17  2.2k  [0603]  62.23,39.88 90 top
R18  4.7k  [0603]  75.82,23.11 0 top
R19  10k  [0603]  80.39,20.19 90 top
R20  100  [0603]  96.01,41.91 180 top
R21  0.012 Ohm  [0603]  88.65,45.97 90 top
R22  100  [0603]  96.01,43.69 0 top
R23  12k  [0603]  105.41,38.61 90 top
R24  30.1k  [0603]  102.36,38.61 270 top
R25  100k  [0603]  97.28,36.7 270 top
R26  1k  [0603]  101.35,23.37 180 top
R27  2.2k  [0603]  101.22,25.91 180 top
R28  10k  [0603]  97.79,39.24 0 top
R29  1k  [0603]  152.65,20.83 180 top
R30  2.2k  [0603]  115.57,39.88 90 top
R31  2.2k  [0603]  113.54,39.88 90 top
R32  4.7k  [0603]  127.13,23.11 0 top
R33  10k  [0603]  131.7,20.19 90 top
R34  100  [0603]  147.32,41.91 180 top
R35  0.012 Ohm  [0603]  139.95,45.97 90 top
R36  100  [0603]  147.32,43.69 0 top
R37  12k  [0603]  156.72,38.61 90 top
R38  30.1k  [0603]  153.67,38.61 270 top
R39  100k  [0603]  148.59,36.7 270 top
R40  1k  [0603]  152.65,23.37 180 top
R41  2.2k  [0603]  152.53,25.91 180 top
R42  10k  [0603]  149.1,39.24 0 top
R43  1k  [0603]  50.04,72.14 180 top
R44  2.2k  [0603]  12.95,91.19 90 top
R45  2.2k  [0603]  10.92,91.19 90 top
R46  4.7k  [0603]  24.51,74.42 0 top
R47  10k  [0603]  29.08,71.5 90 top
R48  100  [0603]  44.7,93.22 180 top
R49  0.012 Ohm  [0603]  37.34,97.28 90 top
R50  100  [0603]  44.7,95 0 top
R51  12k  [0603]  54.1,89.92 90 top
R52  30.1k  [0603]  51.05,89.92 270 top
R53  100k  [0603]  45.97,88.01 270 top
R54  1k  [0603]  50.04,74.68 180 top
R55  2.2k  [0603]  49.91,77.22 180 top
R56  10k  [0603]  46.48,90.55 0 top
R57  1k  [0603]  101.35,72.14 180 top
R58  2.2k  [0603]  64.26,91.19 90 top
R59  2.2k  [0603]  62.23,91.19 90 top
R60  4.7k  [0603]  75.82,74.42 0 top
R61  10k  [0603]  80.39,71.5 90 top
R62  100  [0603]  96.01,93.22 180 top
R63  0.012 Ohm  [0603]  88.65,97.28 90 top
R64  100  [0603]  96.01,95 0 top
R65  12k  [0603]  105.41,89.92 90 top
R66  30.1k  [0603]  102.36,89.92 270 top
R67  100k  [0603]  97.28,88.01 270 top
R68  1k  [0603]  101.35,74.68 180 top
R69  2.2k  [0603]  101.22,77.22 180 top
R70  10k  [0603]  97.79,90.55 0 top
R71  1k  [0603]  152.65,72.14 180 top
R72  2.2k  [0603]  115.57,91.19 90 top
R73  2.2k  [0603]  113.54,91.19 90 top
R74  4.7k  [0603]  127.13,74.42 0 top
R75  10k  [0603]  131.7,71.5 90 top
R76  100  [0603]  147.32,93.22 180 top
R77  0.012 Ohm  [0603]  139.95,97.28 90 top
R78  100  [0603]  147.32,95 0 top
R79  12k  [0603]  156.72,89.92 90 top
R80  30.1k  [0603]  153.67,89.92 270 top
R81  100k  [0603]  148.59,88.01 270 top
R82  1k  [0603]  152.65,74.68 180 top
R83  2.2k  [0603]  152.53,77.22 180 top
R84  10k  [0603]  149.1,90.55 0 top
R85  1k  [0603]  50.04,123.44 180 top
R86  2.2k  [0603]  12.95,142.49 90 top
R87  2.2k  [0603]  10.92,142.49 90 top
R88  4.7k  [0603]  24.51,125.73 0 top
R89  10k  [0603]  29.08,122.81 90 top
R90  100  [0603]  44.7,144.53 180 top
R91  0.012 Ohm  [0603]  37.34,148.59 90 top
R92  100  [0603]  44.7,146.3 0 top
R93  12k  [0603]  54.1,141.22 90 top
R94  30.1k  [0603]  51.05,141.22 270 top
R95  100k  [0603]  45.97,139.32 270 top
R96  1k  [0603]  50.04,125.98 180 top
R97  2.2k  [0603]  49.91,128.52 180 top
R98  10k  [0603]  46.48,141.86 0 top
R99  1k  [0603]  101.35,123.44 180 top
R100  2.2k  [0603]  64.26,142.49 90 top
R101  2.2k  [0603]  62.23,142.49 90 top
R102  4.7k  [0603]  75.82,125.73 0 top
R103  10k  [0603]  80.39,122.81 90 top
R104  100  [0603]  96.01,144.53 180 top
R105  0.012 Ohm  [0603]  88.65,148.59 90 top
R106  100  [0603]  96.01,146.3 0 top
R107  12k  [0603]  105.41,141.22 90 top
R108  30.1k  [0603]  102.36,141.22 270 top
R109  100k  [0603]  97.28,139.32 270 top
R110  1k  [0603]  101.35,125.98 180 top
R111  2.2k  [0603]  101.22,128.52 180 top
R112  10k  [0603]  97.79,141.86 0 top
R113  1k  [0603]  152.65,123.44 180 top
R114  2.2k  [0603]  115.57,142.49 90 top
R115  2.2k  [0603]  113.54,142.49 90 top
R116  4.7k  [0603]  127.13,125.73 0 top
R117  10k  [0603]  131.7,122.81 90 top
R118  100  [0603]  147.32,144.53 180 top
R119  0.012 Ohm  [0603]  139.95,148.59 90 top
R120  100  [0603]  147.32,146.3 0 top
R121  12k  [0603]  156.72,141.22 90 top
R122  30.1k  [0603]  153.67,141.22 270 top
R123  100k  [0603]  148.59,139.32 270 top
R124  1k  [0603]  152.65,125.98 180 top
R125  2.2k  [0603]  152.53,128.52 180 top
R126  10k  [0603]  149.1,141.86 0 top
RX  TEST-POINT3X5  [PAD.03X.05]  11.94,15.75 0 bottom
RX1  TEST-POINT3X5  [PAD.03X.05]  63.25,15.75 0 bottom
RX2  TEST-POINT3X5  [PAD.03X.05]  114.55,15.75 0 bottom
RX3  TEST-POINT3X5  [PAD.03X.05]  11.94,67.06 0 bottom
RX4  TEST-POINT3X5  [PAD.03X.05]  63.25,67.06 0 bottom
RX5  TEST-POINT3X5  [PAD.03X.05]  114.55,67.06 0 bottom
RX6  TEST-POINT3X5  [PAD.03X.05]  11.94,118.36 0 bottom
RX7  TEST-POINT3X5  [PAD.03X.05]  63.25,118.36 0 bottom
RX8  TEST-POINT3X5  [PAD.03X.05]  114.55,118.36 0 bottom
SC1+  [1X01_NO_SILK]  39.75,47.5 0 top
SC1+1  [1X01_NO_SILK]  91.06,47.5 0 top
SC1+2  [1X01_NO_SILK]  142.37,47.5 0 top
SC1+3  [1X01_NO_SILK]  39.75,98.81 0 top
SC1+4  [1X01_NO_SILK]  91.06,98.81 0 top
SC1+5  [1X01_NO_SILK]  142.37,98.81 0 top
SC1+6  [1X01_NO_SILK]  39.75,150.11 0 top
SC1+7  [1X01_NO_SILK]  91.06,150.11 0 top
SC1+8  [1X01_NO_SILK]  142.37,150.11 0 top
SC1-  [1X01_NO_SILK]  34.73,47.5 0 top
SC1-1  [1X01_NO_SILK]  86.04,47.5 0 top
SC1-2  [1X01_NO_SILK]  137.35,47.5 0 top
SC1-3  [1X01_NO_SILK]  34.73,98.81 0 top
SC1-4  [1X01_NO_SILK]  86.04,98.81 0 top
SC1-5  [1X01_NO_SILK]  137.35,98.81 0 top
SC1-6  [1X01_NO_SILK]  34.73,150.11 0 top
SC1-7  [1X01_NO_SILK]  86.04,150.11 0 top
SC1-8  [1X01_NO_SILK]  137.35,150.11 0 top
SC2+  [1X01_NO_SILK]  29.78,47.5 0 top
SC2+1  [1X01_NO_SILK]  81.09,47.5 0 top
SC2+2  [1X01_NO_SILK]  132.4,47.5 0 top
SC2+3  [1X01_NO_SILK]  29.78,98.81 0 top
SC2+4  [1X01_NO_SILK]  81.09,98.81 0 top
SC2+5  [1X01_NO_SILK]  132.4,98.81 0 top
SC2+6  [1X01_NO_SILK]  29.78,150.11 0 top
SC2+7  [1X01_NO_SILK]  81.09,150.11 0 top
SC2+8  [1X01_NO_SILK]  132.4,150.11 0 top
SC2-  [1X01_NO_SILK]  24.7,47.5 0 top
SC2-1  [1X01_NO_SILK]  76.01,47.5 0 top
SC2-2  [1X01_NO_SILK]  127.32,47.5 0 top
SC2-3  [1X01_NO_SILK]  24.7,98.81 0 top
SC2-4  [1X01_NO_SILK]  76.01,98.81 0 top
SC2-5  [1X01_NO_SILK]  127.32,98.81 0 top
SC2-6  [1X01_NO_SILK]  24.7,150.11 0 top
SC2-7  [1X01_NO_SILK]  76.01,150.11 0 top
SC2-8  [1X01_NO_SILK]  127.32,150.11 0 top
TX  TEST-POINT3X5  [PAD.03X.05]  9.4,15.75 0 bottom
TX1  TEST-POINT3X5  [PAD.03X.05]  60.71,15.75 0 bottom
TX2  TEST-POINT3X5  [PAD.03X.05]  112.01,15.75 0 bottom
TX3  TEST-POINT3X5  [PAD.03X.05]  9.4,67.06 0 bottom
TX4  TEST-POINT3X5  [PAD.03X.05]  60.71,67.06 0 bottom
TX5  TEST-POINT3X5  [PAD.03X.05]  112.01,67.06 0 bottom
TX6  TEST-POINT3X5  [PAD.03X.05]  9.4,118.36 0 bottom
TX7  TEST-POINT3X5  [PAD.03X.05]  60.71,118.36 0 bottom
TX8  TEST-POINT3X5  [PAD.03X.05]  112.01,118.36 0 bottom
U1  ATTINY841SOIC  [ATTINY841]  30.99,26.04 0 top
U2  LTC3225EDDB#TRMPBF  [DFN300X200-10L]  37.46,36.58 0 top
U3  ADM4210-1  [TSOT6]  40.89,43.81 0 top
U4  LTC3225EDDB#TRMPBF  [DFN300X200-10L]  88.77,36.58 0 top
U5  ADM4210-1  [TSOT6]  92.2,43.81 0 top
U6  ATTINY841SOIC  [ATTINY841]  82.3,26.04 0 top
U7  LTC3225EDDB#TRMPBF  [DFN300X200-10L]  140.08,36.58 0 top
U8  ADM4210-1  [TSOT6]  143.51,43.81 0 top
U9  ATTINY841SOIC  [ATTINY841]  133.6,26.04 0 top
U10  LTC3225EDDB#TRMPBF  [DFN300X200-10L]  37.46,87.88 0 top
U11  ADM4210-1  [TSOT6]  40.89,95.12 0 top
U12  ATTINY841SOIC  [ATTINY841]  30.99,77.34 0 top
U13  LTC3225EDDB#TRMPBF  [DFN300X200-10L]  88.77,87.88 0 top
U14  ADM4210-1  [TSOT6]  92.2,95.12 0 top
U15  ATTINY841SOIC  [ATTINY841]  82.3,77.34 0 top
U16  LTC3225EDDB#TRMPBF  [DFN300X200-10L]  140.08,87.88 0 top
U17  ADM4210-1  [TSOT6]  143.51,95.12 0 top
U18  ATTINY841SOIC  [ATTINY841]  133.6,77.34 0 top
U19  LTC3225EDDB#TRMPBF  [DFN300X200-10L]  37.46,139.19 0 top
U20  ADM4210-1  [TSOT6]  40.89,146.43 0 top
U21  ATTINY841SOIC  [ATTINY841]  30.99,128.65 0 top
U22  LTC3225EDDB#TRMPBF  [DFN300X200-10L]  88.77,139.19 0 top
U23  ADM4210-1  [TSOT6]  92.2,146.43 0 top
U24  ATTINY841SOIC  [ATTINY841]  82.3,128.65 0 top
U25  LTC3225EDDB#TRMPBF  [DFN300X200-10L]  140.08,139.19 0 top
U26  ADM4210-1  [TSOT6]  143.51,146.43 0 top
U27  ATTINY841SOIC  [ATTINY841]  133.6,128.65 0 top
U$1  [60MA0]  51.56,43.81 90 top
U$2  [POWER0]  51.94,22.1 0 top
U$3  [GND1]  25.91,8.51 90 bottom
U$4  [3#3V2]  28.45,8.51 90 bottom
U$5  [SDA8]  30.99,8.51 90 bottom
U$6  [SCL9]  33.53,8.51 90 bottom
U$7  [RST#-[>]  36.07,8.38 90 top
U$8  [I_SUPER2_C-()-03]  10.54,44.32 0 top
U$9  [CHARGING0]  50.29,24.64 0 top
U$10  [9603N_POWER0]  48.39,27.43 0 top
U$11  [5#3V0]  38.61,8.51 90 bottom
U$12  [QWIIC0]  11.68,53.21 0 top
U$13  [150MA0]  53.59,43.81 90 top
U$14  [CHARGE0]  55.24,43.56 90 top
U$15  [CURRENT0]  56.51,43.43 90 top
U$16  [RST#-[>]  36.07,8.38 90 bottom
U$17  [QWIIC0]  18.8,42.29 0 bottom
U$18  [IRIDIUM0]  10.92,50.8 0 top
U$19  [IRIDIUM0]  19.43,39.88 0 bottom
U$20  [9603N0]  11.3,48.39 0 top
U$21  [3#3V2]  28.45,8.51 90 top
U$22  [GND1]  25.91,8.51 90 top
U$23  [QWIIC0]  15.37,28.07 90 top
U$24  [9603N0]  19.3,37.34 0 bottom
U$25  [QWIIC0]  49.66,36.45 270 top
U$26  [SCL9]  33.53,8.51 90 top
U$27  [SDA8]  30.99,8.51 90 top
U$28  [3#3V2]  79.76,8.51 90 top
U$29  [SPARKX-LARGE]  15.75,48.77 0 bottom
U$30  [SPARKX-LARGE]  18.29,9.4 0 top
U$31  [_PWR1]  50.42,18.29 0 top
U$32  [5#3V0]  38.61,8.51 90 top
U$33  [GND1]  77.22,8.51 90 top
U$34  [SCL9]  84.84,8.51 90 top
U$35  [SDA8]  82.3,8.51 90 top
U$36  [GND1]  77.22,8.51 90 bottom
U$37  [3#3V2]  79.76,8.51 90 bottom
U$38  [SDA8]  82.3,8.51 90 bottom
U$39  [SCL9]  84.84,8.51 90 bottom
U$40  [I_SUPER2_C-()-03]  61.85,44.32 0 top
U$41  [RST#-[>]  87.38,8.38 90 top
U$42  [RST#-[>]  87.38,8.38 90 bottom
U$43  [POWER0]  103.25,22.1 0 top
U$44  [CHARGING0]  101.6,24.64 0 top
U$45  [9603N_POWER0]  99.7,27.43 0 top
U$46  [60MA0]  102.87,43.81 90 top
U$47  [150MA0]  104.9,43.81 90 top
U$48  [CHARGE0]  106.55,43.56 90 top
U$49  [CURRENT0]  107.82,43.43 90 top
U$50  [QWIIC0]  62.99,53.21 0 top
U$51  [QWIIC0]  70.1,42.29 0 bottom
U$52  [IRIDIUM0]  62.23,50.8 0 top
U$53  [IRIDIUM0]  70.74,39.88 0 bottom
U$54  [9603N0]  62.61,48.39 0 top
U$55  [9603N0]  70.61,37.34 0 bottom
U$56  [QWIIC0]  66.67,28.07 90 top
U$57  [QWIIC0]  100.97,36.45 270 top
U$58  [SPARKX-LARGE]  67.06,48.77 0 bottom
U$59  [SPARKX-LARGE]  69.6,9.4 0 top
U$60  [_PWR1]  101.73,18.29 0 top
U$61  [5#3V0]  89.92,8.51 90 top
U$62  [5#3V0]  89.92,8.51 90 bottom
U$63  [3#3V2]  131.06,8.51 90 top
U$64  [GND1]  128.52,8.51 90 top
U$65  [SCL9]  136.14,8.51 90 top
U$66  [SDA8]  133.6,8.51 90 top
U$67  [GND1]  128.52,8.51 90 bottom
U$68  [3#3V2]  131.06,8.51 90 bottom
U$69  [SDA8]  133.6,8.51 90 bottom
U$70  [SCL9]  136.14,8.51 90 bottom
U$71  [I_SUPER2_C-()-03]  113.16,44.32 0 top
U$72  [RST#-[>]  138.68,8.38 90 top
U$73  [RST#-[>]  138.68,8.38 90 bottom
U$74  [POWER0]  154.56,22.1 0 top
U$75  [CHARGING0]  152.91,24.64 0 top
U$76  [9603N_POWER0]  151,27.43 0 top
U$77  [60MA0]  154.18,43.81 90 top
U$78  [150MA0]  156.21,43.81 90 top
U$79  [CHARGE0]  157.86,43.56 90 top
U$80  [CURRENT0]  159.13,43.43 90 top
U$81  [QWIIC0]  114.3,53.21 0 top
U$82  [QWIIC0]  121.41,42.29 0 bottom
U$83  [IRIDIUM0]  113.54,50.8 0 top
U$84  [IRIDIUM0]  122.05,39.88 0 bottom
U$85  [9603N0]  113.92,48.39 0 top
U$86  [9603N0]  121.92,37.34 0 bottom
U$87  [QWIIC0]  117.98,28.07 90 top
U$88  [QWIIC0]  152.27,36.45 270 top
U$89  [SPARKX-LARGE]  118.36,48.77 0 bottom
U$90  [SPARKX-LARGE]  120.9,9.4 0 top
U$91  [_PWR1]  153.03,18.29 0 top
U$92  [5#3V0]  141.22,8.51 90 top
U$93  [5#3V0]  141.22,8.51 90 bottom
U$94  [3#3V2]  28.45,59.82 90 top
U$95  [GND1]  25.91,59.82 90 top
U$96  [SCL9]  33.53,59.82 90 top
U$97  [SDA8]  30.99,59.82 90 top
U$98  [GND1]  25.91,59.82 90 bottom
U$99  [3#3V2]  28.45,59.82 90 bottom
U$100  [SDA8]  30.99,59.82 90 bottom
U$101  [SCL9]  33.53,59.82 90 bottom
U$102  [I_SUPER2_C-()-03]  10.54,95.63 0 top
U$103  [RST#-[>]  36.07,59.69 90 top
U$104  [RST#-[>]  36.07,59.69 90 bottom
U$105  [POWER0]  51.94,73.41 0 top
U$106  [CHARGING0]  50.29,75.95 0 top
U$107  [9603N_POWER0]  48.39,78.74 0 top
U$108  [60MA0]  51.56,95.12 90 top
U$109  [150MA0]  53.59,95.12 90 top
U$110  [CHARGE0]  55.24,94.87 90 top
U$111  [CURRENT0]  56.51,94.74 90 top
U$112  [QWIIC0]  11.68,104.52 0 top
U$113  [QWIIC0]  18.8,93.6 0 bottom
U$114  [IRIDIUM0]  10.92,102.11 0 top
U$115  [IRIDIUM0]  19.43,91.19 0 bottom
U$116  [9603N0]  11.3,99.7 0 top
U$117  [9603N0]  19.3,88.65 0 bottom
U$118  [QWIIC0]  15.37,79.38 90 top
U$119  [QWIIC0]  49.66,87.76 270 top
U$120  [SPARKX-LARGE]  15.75,100.08 0 bottom
U$121  [SPARKX-LARGE]  18.29,60.71 0 top
U$122  [_PWR1]  50.42,69.6 0 top
U$123  [5#3V0]  38.61,59.82 90 top
U$124  [5#3V0]  38.61,59.82 90 bottom
U$125  [3#3V2]  79.76,59.82 90 top
U$126  [GND1]  77.22,59.82 90 top
U$127  [SCL9]  84.84,59.82 90 top
U$128  [SDA8]  82.3,59.82 90 top
U$129  [GND1]  77.22,59.82 90 bottom
U$130  [3#3V2]  79.76,59.82 90 bottom
U$131  [SDA8]  82.3,59.82 90 bottom
U$132  [SCL9]  84.84,59.82 90 bottom
U$133  [I_SUPER2_C-()-03]  61.85,95.63 0 top
U$134  [RST#-[>]  87.38,59.69 90 top
U$135  [RST#-[>]  87.38,59.69 90 bottom
U$136  [POWER0]  103.25,73.41 0 top
U$137  [CHARGING0]  101.6,75.95 0 top
U$138  [9603N_POWER0]  99.7,78.74 0 top
U$139  [60MA0]  102.87,95.12 90 top
U$140  [150MA0]  104.9,95.12 90 top
U$141  [CHARGE0]  106.55,94.87 90 top
U$142  [CURRENT0]  107.82,94.74 90 top
U$143  [QWIIC0]  62.99,104.52 0 top
U$144  [QWIIC0]  70.1,93.6 0 bottom
U$145  [IRIDIUM0]  62.23,102.11 0 top
U$146  [IRIDIUM0]  70.74,91.19 0 bottom
U$147  [9603N0]  62.61,99.7 0 top
U$148  [9603N0]  70.61,88.65 0 bottom
U$149  [QWIIC0]  66.67,79.38 90 top
U$150  [QWIIC0]  100.97,87.76 270 top
U$151  [SPARKX-LARGE]  67.06,100.08 0 bottom
U$152  [SPARKX-LARGE]  69.6,60.71 0 top
U$153  [_PWR1]  101.73,69.6 0 top
U$154  [5#3V0]  89.92,59.82 90 top
U$155  [5#3V0]  89.92,59.82 90 bottom
U$156  [3#3V2]  131.06,59.82 90 top
U$157  [GND1]  128.52,59.82 90 top
U$158  [SCL9]  136.14,59.82 90 top
U$159  [SDA8]  133.6,59.82 90 top
U$160  [GND1]  128.52,59.82 90 bottom
U$161  [3#3V2]  131.06,59.82 90 bottom
U$162  [SDA8]  133.6,59.82 90 bottom
U$163  [SCL9]  136.14,59.82 90 bottom
U$164  [I_SUPER2_C-()-03]  113.16,95.63 0 top
U$165  [RST#-[>]  138.68,59.69 90 top
U$166  [RST#-[>]  138.68,59.69 90 bottom
U$167  [POWER0]  154.56,73.41 0 top
U$168  [CHARGING0]  152.91,75.95 0 top
U$169  [9603N_POWER0]  151,78.74 0 top
U$170  [60MA0]  154.18,95.12 90 top
U$171  [150MA0]  156.21,95.12 90 top
U$172  [CHARGE0]  157.86,94.87 90 top
U$173  [CURRENT0]  159.13,94.74 90 top
U$174  [QWIIC0]  114.3,104.52 0 top
U$175  [QWIIC0]  121.41,93.6 0 bottom
U$176  [IRIDIUM0]  113.54,102.11 0 top
U$177  [IRIDIUM0]  122.05,91.19 0 bottom
U$178  [9603N0]  113.92,99.7 0 top
U$179  [9603N0]  121.92,88.65 0 bottom
U$180  [QWIIC0]  117.98,79.38 90 top
U$181  [QWIIC0]  152.27,87.76 270 top
U$182  [SPARKX-LARGE]  118.36,100.08 0 bottom
U$183  [SPARKX-LARGE]  120.9,60.71 0 top
U$184  [_PWR1]  153.03,69.6 0 top
U$185  [5#3V0]  141.22,59.82 90 top
U$186  [5#3V0]  141.22,59.82 90 bottom
U$187  [3#3V2]  28.45,111.12 90 top
U$188  [GND1]  25.91,111.12 90 top
U$189  [SCL9]  33.53,111.12 90 top
U$190  [SDA8]  30.99,111.12 90 top
U$191  [GND1]  25.91,111.12 90 bottom
U$192  [3#3V2]  28.45,111.12 90 bottom
U$193  [SDA8]  30.99,111.12 90 bottom
U$194  [SCL9]  33.53,111.12 90 bottom
U$195  [I_SUPER2_C-()-03]  10.54,146.94 0 top
U$196  [RST#-[>]  36.07,111 90 top
U$197  [RST#-[>]  36.07,111 90 bottom
U$198  [POWER0]  51.94,124.71 0 top
U$199  [CHARGING0]  50.29,127.25 0 top
U$200  [9603N_POWER0]  48.39,130.05 0 top
U$201  [60MA0]  51.56,146.43 90 top
U$202  [150MA0]  53.59,146.43 90 top
U$203  [CHARGE0]  55.24,146.18 90 top
U$204  [CURRENT0]  56.51,146.05 90 top
U$205  [QWIIC0]  11.68,155.83 0 top
U$206  [QWIIC0]  18.8,144.91 0 bottom
U$207  [IRIDIUM0]  10.92,153.42 0 top
U$208  [IRIDIUM0]  19.43,142.49 0 bottom
U$209  [9603N0]  11.3,151 0 top
U$210  [9603N0]  19.3,139.95 0 bottom
U$211  [QWIIC0]  15.37,130.68 90 top
U$212  [QWIIC0]  49.66,139.06 270 top
U$213  [SPARKX-LARGE]  15.75,151.38 0 bottom
U$214  [SPARKX-LARGE]  18.29,112.01 0 top
U$215  [_PWR1]  50.42,120.9 0 top
U$216  [5#3V0]  38.61,111.12 90 top
U$217  [5#3V0]  38.61,111.12 90 bottom
U$218  [3#3V2]  79.76,111.12 90 top
U$219  [GND1]  77.22,111.12 90 top
U$220  [SCL9]  84.84,111.12 90 top
U$221  [SDA8]  82.3,111.12 90 top
U$222  [GND1]  77.22,111.12 90 bottom
U$223  [3#3V2]  79.76,111.12 90 bottom
U$224  [SDA8]  82.3,111.12 90 bottom
U$225  [SCL9]  84.84,111.12 90 bottom
U$226  [I_SUPER2_C-()-03]  61.85,146.94 0 top
U$227  [RST#-[>]  87.38,111 90 top
U$228  [RST#-[>]  87.38,111 90 bottom
U$229  [POWER0]  103.25,124.71 0 top
U$230  [CHARGING0]  101.6,127.25 0 top
U$231  [9603N_POWER0]  99.7,130.05 0 top
U$232  [60MA0]  102.87,146.43 90 top
U$233  [150MA0]  104.9,146.43 90 top
U$234  [CHARGE0]  106.55,146.18 90 top
U$235  [CURRENT0]  107.82,146.05 90 top
U$236  [QWIIC0]  62.99,155.83 0 top
U$237  [QWIIC0]  70.1,144.91 0 bottom
U$238  [IRIDIUM0]  62.23,153.42 0 top
U$239  [IRIDIUM0]  70.74,142.49 0 bottom
U$240  [9603N0]  62.61,151 0 top
U$241  [9603N0]  70.61,139.95 0 bottom
U$242  [QWIIC0]  66.67,130.68 90 top
U$243  [QWIIC0]  100.97,139.06 270 top
U$244  [SPARKX-LARGE]  67.06,151.38 0 bottom
U$245  [SPARKX-LARGE]  69.6,112.01 0 top
U$246  [_PWR1]  101.73,120.9 0 top
U$247  [5#3V0]  89.92,111.12 90 top
U$248  [5#3V0]  89.92,111.12 90 bottom
U$249  [3#3V2]  131.06,111.12 90 top
U$250  [GND1]  128.52,111.12 90 top
U$251  [SCL9]  136.14,111.12 90 top
U$252  [SDA8]  133.6,111.12 90 top
U$253  [GND1]  128.52,111.12 90 bottom
U$254  [3#3V2]  131.06,111.12 90 bottom
U$255  [SDA8]  133.6,111.12 90 bottom
U$256  [SCL9]  136.14,111.12 90 bottom
U$257  [I_SUPER2_C-()-03]  113.16,146.94 0 top
U$258  [RST#-[>]  138.68,111 90 top
U$259  [RST#-[>]  138.68,111 90 bottom
U$260  [POWER0]  154.56,124.71 0 top
U$261  [CHARGING0]  152.91,127.25 0 top
U$262  [9603N_POWER0]  151,130.05 0 top
U$263  [60MA0]  154.18,146.43 90 top
U$264  [150MA0]  156.21,146.43 90 top
U$265  [CHARGE0]  157.86,146.18 90 top
U$266  [CURRENT0]  159.13,146.05 90 top
U$267  [QWIIC0]  114.3,155.83 0 top
U$268  [QWIIC0]  121.41,144.91 0 bottom
U$269  [IRIDIUM0]  113.54,153.42 0 top
U$270  [IRIDIUM0]  122.05,142.49 0 bottom
U$271  [9603N0]  113.92,151 0 top
U$272  [9603N0]  121.92,139.95 0 bottom
U$273  [QWIIC0]  117.98,130.68 90 top
U$274  [QWIIC0]  152.27,139.06 270 top
U$275  [SPARKX-LARGE]  118.36,151.38 0 bottom
U$276  [SPARKX-LARGE]  120.9,112.01 0 top
U$277  [_PWR1]  153.03,120.9 0 top
U$278  [5#3V0]  141.22,111.12 90 top
U$279  [5#3V0]  141.22,111.12 90 bottom

## Library data of the parts
C1 C11 C21 C31 C41 C51 C61 C71 C81 = SparkFun-Capacitors; PROD_ID: CAP-08604
C2 C16 C26 C36 C46 C56 C66 C76 C86 = SparkFun-Capacitors; PROD_ID: CAP-07888
C3 C8 C10 C14 C18 C20 C24 C28 C30 C34 C38 C40 C44 C48 C50 C54 C58 C60 C64 C68 C70 C74 C78 C80 C84 C88 C90 = SparkFun-Capacitors; PROD_ID: CAP-13930
C4 C15 C25 C35 C45 C55 C65 C75 C85 = SparkFun-Capacitors; PROD_ID: CAP-07822
C5 C6 C12 C13 C22 C23 C32 C33 C42 C43 C52 C53 C62 C63 C72 C73 C82 C83 = SparkFun-Capacitors
C7 C17 C27 C37 C47 C57 C67 C77 C87 = SparkFun-Capacitors; PROD_ID: CAP-11015
C9 C19 C29 C39 C49 C59 C69 C79 C89 = SparkFun-Capacitors; PROD_ID: CAP-00867
D1 D4 D7 D10 D13 D16 D19 D22 D25 = SparkFun-LED; PROD_ID: DIO-00819
D2 D5 D8 D11 D14 D17 D20 D23 D26 = SparkFun-LED; PROD_ID: DIO-09003
D3 D6 D9 D12 D15 D18 D21 D24 D27 = SparkFun-LED; PROD_ID: DIO-00821
E1-E9 = SparkFun-RF; PROD_ID: CONN-08289
E$1-E$4 JP5-JP8 JP13-JP16 JP23-JP26 JP33-JP36 JP43-JP46 JP53-JP56 JP63-JP66 JP73-JP76 JP83-JP86 LOGO1-LOGO9 = SparkFun-Aesthetics
E$5 E$6 = SparkFun-Retired
J1 J15 J23 J31 J39 J47 J55 J63 J71 U1-U27 = Qwiic_Iridium_9603N
J2 J4 J9 J11 J17 J19 J25 J27 J33 J35 J41 J43 J49 J51 J57 J59 J65 J67 = SparkFun-Connectors; PROD_ID: CONN-13694; VALUE: QWIIC_RIGHT_ANGLE
J3 J10 J18 J26 J34 J42 J50 J58 J66 U$29 U$30 U$58 U$59 U$89 U$90 U$120 U$121 U$151 U$152 U$182 U$183 U$213 U$214 U$244 U$245 U$275 U$276 = SparkX
J5 J6 J8 J12 J13 J16 J20 J21 J24 J28 J29 J32 J36 J37 J40 J44 J45 J48 J52 J53 J56 J60 J61 J64 J68 J69 J72 RX RX1-RX8 SC1+ SC1+1-SC1+8 SC1- SC1-1-SC1-8 SC2+ SC2+1-SC2+8 SC2- SC2-1-SC2-8 TX TX1-TX8 = SparkFun-Connectors
J7 J14 J22 J30 J38 J46 J54 J62 J70 = SparkFun-Connectors; PROD_ID: CONN-09193; SF_ID: WRL-09144
JP1 JP2 JP17 JP20 JP27 JP30 JP37 JP40 JP47 JP50 JP57 JP60 JP67 JP70 JP77 JP80 JP87 JP90 PWR PWR1-PWR8 = SparkFun-Jumpers
JP3 JP4 JP9-JP12 JP18 JP19 JP21 JP22 JP28 JP29 JP31 JP32 JP38 JP39 JP41 JP42 JP48 JP49 JP51 JP52 JP58 JP59 JP61 JP62 JP68 JP69 JP71 JP72 JP78 JP79 JP81 JP82 JP88 JP89 = SparkFun-Hardware
Q1-Q9 = SparkFun-DiscreteSemi; PROD_ID: TRANS-12988
R1 R12 R15 R26 R29 R40 R43 R54 R57 R68 R71 R82 R85 R96 R99 R110 R113 R124 = Qwiic_Iridium_9603N; PROD_ID: RES-07856
R2 R3 R13 R16 R17 R27 R30 R31 R41 R44 R45 R55 R58 R59 R69 R72 R73 R83 R86 R87 R97 R100 R101 R111 R114 R115 R125 = SparkFun-Resistors; PROD_ID: RES-08272
R4 R18 R32 R46 R60 R74 R88 R102 R116 = SparkFun-Resistors; PROD_ID: RES-07857
R5 R14 R19 R28 R33 R42 R47 R56 R61 R70 R75 R84 R89 R98 R103 R112 R117 R126 = SparkFun-Resistors; PROD_ID: RES-00824
R6 R23 R37 R51 R65 R79 R93 R107 R121 = SparkFun-Resistors; PROD_ID: RES-10327
R7 R9 R21 R24 R35 R38 R49 R52 R63 R66 R77 R80 R91 R94 R105 R108 R119 R122 = SparkFun-Resistors
R8 R25 R39 R53 R67 R81 R95 R109 R123 = SparkFun-Resistors; PROD_ID: RES-07828
R10 R11 R20 R22 R34 R36 R48 R50 R62 R64 R76 R78 R90 R92 R104 R106 R118 R120 = SparkFun-Resistors; PROD_ID: RES-07863
U$1 U$46 U$77 U$108 U$139 U$170 U$201 U$232 U$263 = 60mA
U$2 U$43 U$74 U$105 U$136 U$167 U$198 U$229 U$260 = POWER
U$3-U$6 U$21 U$22 U$26-U$28 U$33-U$39 U$63-U$70 U$94-U$101 U$125-U$132 U$156-U$163 U$187-U$194 U$218-U$225 U$249-U$256 = Labels-0_04
U$7 U$8 U$16 U$40-U$42 U$71-U$73 U$102-U$104 U$133-U$135 U$164-U$166 U$195-U$197 U$226-U$228 U$257-U$259 = Labels
U$9 U$44 U$75 U$106 U$137 U$168 U$199 U$230 U$261 = CHARGING
U$10 U$45 U$76 U$107 U$138 U$169 U$200 U$231 U$262 = 9603N_POWER
U$11 U$31 U$32 U$60-U$62 U$91-U$93 U$122-U$124 U$153-U$155 U$184-U$186 U$215-U$217 U$246-U$248 U$277-U$279 = buzzard_labels (7)
U$12 U$17 U$50 U$51 U$81 U$82 U$112 U$113 U$143 U$144 U$174 U$175 U$205 U$206 U$236 U$237 U$267 U$268 = Qwiic_007
U$13 U$47 U$78 U$109 U$140 U$171 U$202 U$233 U$264 = 150mA
U$14 U$48 U$79 U$110 U$141 U$172 U$203 U$234 U$265 = Charge
U$15 U$49 U$80 U$111 U$142 U$173 U$204 U$235 U$266 = Current
U$18 U$19 U$52 U$53 U$83 U$84 U$114 U$115 U$145 U$146 U$176 U$177 U$207 U$208 U$238 U$239 U$269 U$270 = Iridium_007
U$20 U$24 U$54 U$55 U$85 U$86 U$116 U$117 U$147 U$148 U$178 U$179 U$209 U$210 U$240 U$241 U$271 U$272 = 9603N_007
U$23 U$25 U$56 U$57 U$87 U$88 U$118 U$119 U$149 U$150 U$180 U$181 U$211 U$212 U$242 U$243 U$273 U$274 = Qwiic_Bubble